# EAGLE board relay_wired (EAGLE 7.3.0)
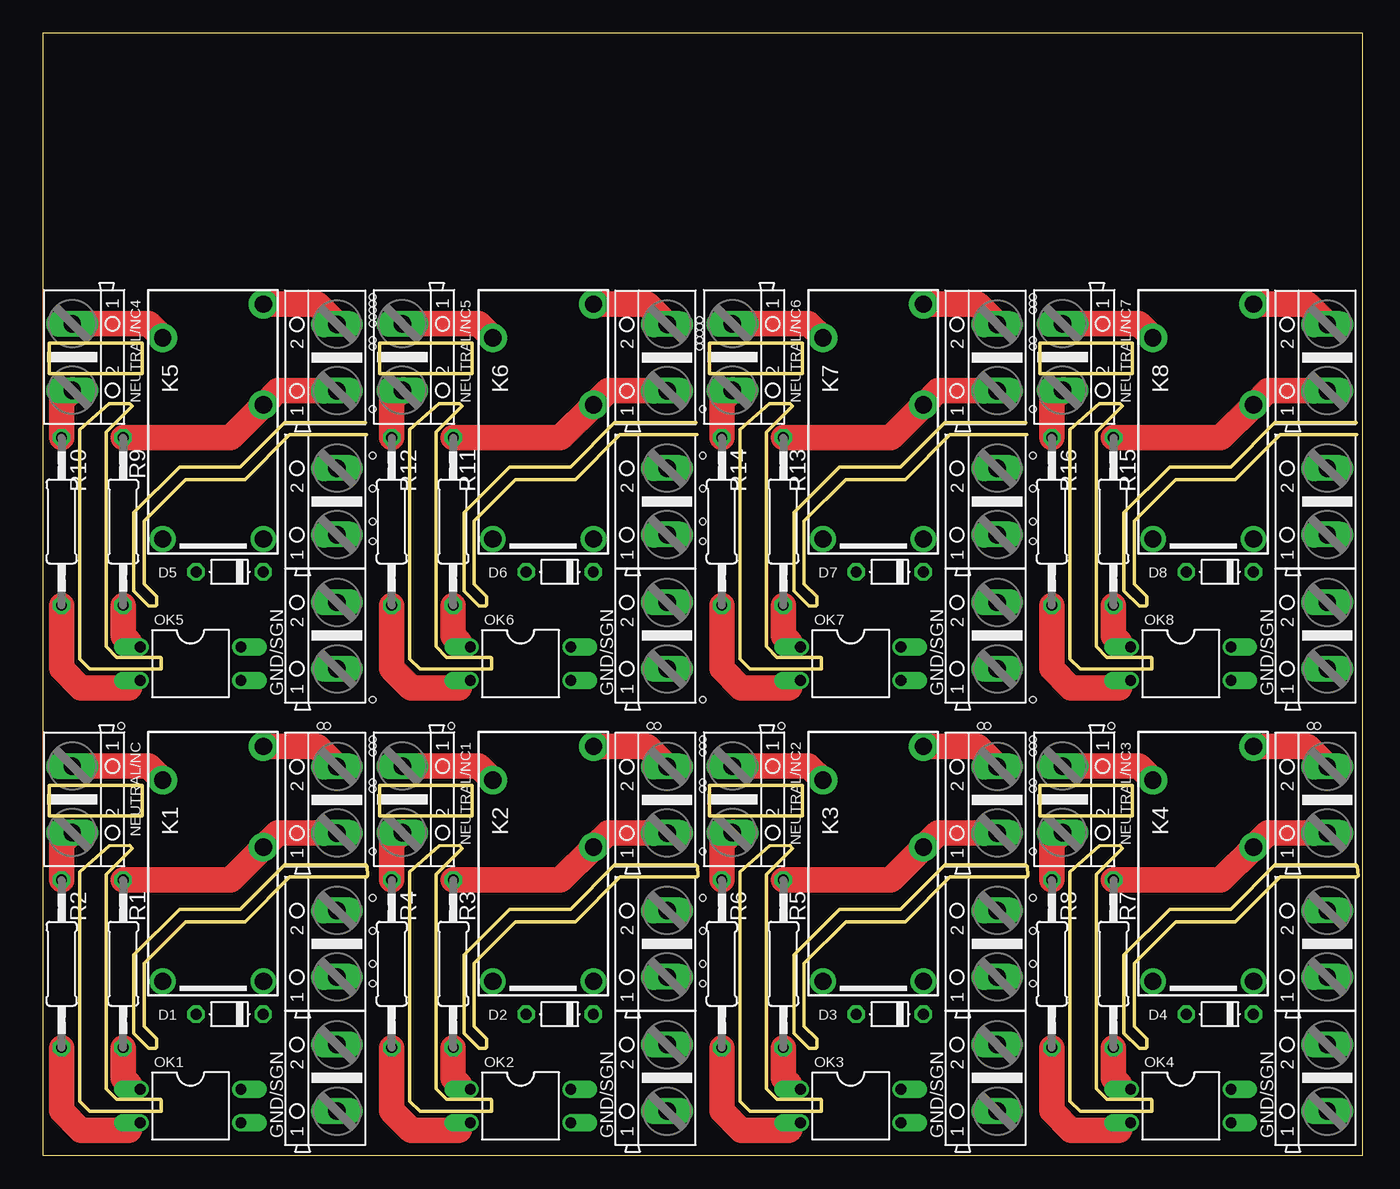
[diagram p0: board, top side]
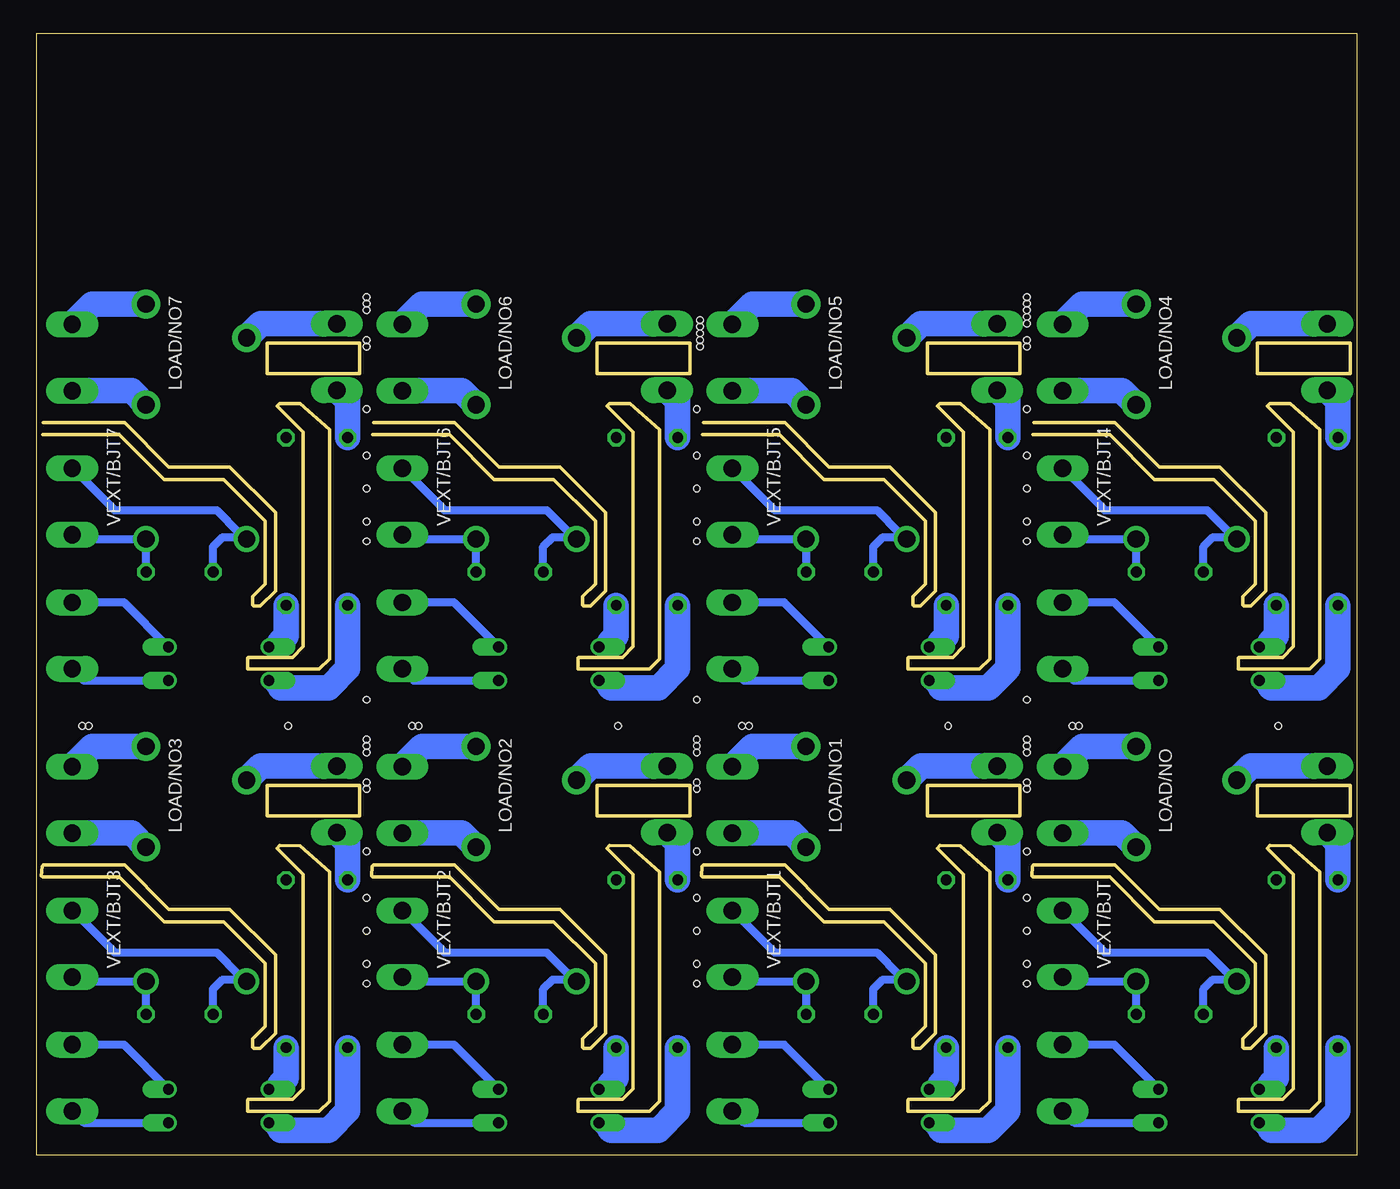
[diagram p1: board, bottom side, seen from below]

Size 100 x 85 mm. Coordinates in mm from the lower left corner, seen from the top.
Outline: 24.49,21.99 24.48,21.99
Outline: 24.48,21.99 18.33,21.99 14.98,18.64 10.37,18.64 6.91,15.18 6.91,9.24 8.05,8.1 8.56,8.1 8.64,8.18 8.64,8.81 7.68,9.77 7.68,14.54 10.83,17.69 15.35,17.69 18.73,21.07 24.55,21.07 24.63,21.15 24.59,21.88 24.48,21.99
Outline: 49.49,21.99 49.48,21.99
Outline: 49.48,21.99 43.33,21.99 39.98,18.64 35.37,18.64 31.91,15.18 31.91,9.24 33.05,8.1 33.56,8.1 33.64,8.18 33.64,8.81 32.68,9.77 32.68,14.54 35.83,17.69 40.35,17.69 43.73,21.07 49.55,21.07 49.63,21.15 49.59,21.88 49.48,21.99
Outline: 74.49,21.99 74.48,21.99
Outline: 74.48,21.99 68.33,21.99 64.98,18.64 60.37,18.64 56.91,15.18 56.91,9.24 58.05,8.1 58.56,8.1 58.64,8.18 58.64,8.81 57.68,9.77 57.68,14.54 60.83,17.69 65.35,17.69 68.73,21.07 74.55,21.07 74.63,21.15 74.59,21.88 74.48,21.99
Outline: 99.49,21.99 99.48,21.99
Outline: 99.48,21.99 93.33,21.99 89.98,18.64 85.37,18.64 81.91,15.18 81.91,9.24 83.05,8.1 83.56,8.1 83.64,8.18 83.64,8.81 82.68,9.77 82.68,14.54 85.83,17.69 90.35,17.69 93.73,21.07 99.55,21.07 99.63,21.15 99.59,21.88 99.48,21.99
Outline: 24.48,55.49 18.33,55.49 14.98,52.14 10.37,52.14 6.91,48.68 6.91,42.74 8.05,41.6 8.56,41.6 8.64,41.68 8.64,42.31 7.68,43.27 7.68,48.04 10.83,51.19 15.35,51.19 18.73,54.57 24.55,54.57
Outline: 49.48,55.49 43.33,55.49 39.98,52.14 35.37,52.14 31.91,48.68 31.91,42.74 33.05,41.6 33.56,41.6 33.64,41.68 33.64,42.31 32.68,43.27 32.68,48.04 35.83,51.19 40.35,51.19 43.73,54.57 49.55,54.57
Outline: 74.48,55.49 68.33,55.49 64.98,52.14 60.37,52.14 56.91,48.68 56.91,42.74 58.05,41.6 58.56,41.6 58.64,41.68 58.64,42.31 57.68,43.27 57.68,48.04 60.83,51.19 65.35,51.19 68.73,54.57 74.55,54.57
Outline: 99.48,55.49 93.33,55.49 89.98,52.14 85.37,52.14 81.91,48.68 81.91,42.74 83.05,41.6 83.56,41.6 83.64,41.68 83.64,42.31 82.68,43.27 82.68,48.04 85.83,51.19 90.35,51.19 93.73,54.57 99.55,54.57
Outline: 0,0 100,0 100,85 0,85 0,0
Outline: 0.52,28 0.52,25.72 7.54,25.72 7.54,28 0.52,28
Outline: 5.04,23.43 2.81,21.45 2.81,4.1 3.59,3.32 9,3.32 9,4.18 8.96,4.22 5.61,4.22 4.81,5.02 4.81,21.28 6.78,23.25 6.59,23.45 5.04,23.43
Outline: 25.52,28 25.52,25.72 32.54,25.72 32.54,28 25.52,28
Outline: 30.04,23.43 27.81,21.45 27.81,4.1 28.59,3.32 34,3.32 34,4.18 33.96,4.22 30.61,4.22 29.81,5.02 29.81,21.28 31.78,23.25 31.59,23.45 30.04,23.43
Outline: 50.52,28 50.52,25.72 57.54,25.72 57.54,28 50.52,28
Outline: 55.04,23.43 52.81,21.45 52.81,4.1 53.59,3.32 59,3.32 59,4.18 58.96,4.22 55.61,4.22 54.81,5.02 54.81,21.28 56.78,23.25 56.59,23.45 55.04,23.43
Outline: 75.52,28 75.52,25.72 82.54,25.72 82.54,28 75.52,28
Outline: 80.04,23.43 77.81,21.45 77.81,4.1 78.59,3.32 84,3.32 84,4.18 83.96,4.22 80.61,4.22 79.81,5.02 79.81,21.28 81.78,23.25 81.59,23.45 80.04,23.43
Outline: 0.52,61.5 0.52,59.22 7.54,59.22 7.54,61.5 0.52,61.5
Outline: 5.04,56.93 2.81,54.95 2.81,37.6 3.59,36.82 9,36.82 9,37.68 8.96,37.72 5.61,37.72 4.81,38.52 4.81,54.78 6.78,56.75 6.59,56.95 5.04,56.93
Outline: 25.52,61.5 25.52,59.22 32.54,59.22 32.54,61.5 25.52,61.5
Outline: 30.04,56.93 27.81,54.95 27.81,37.6 28.59,36.82 34,36.82 34,37.68 33.96,37.72 30.61,37.72 29.81,38.52 29.81,54.78 31.78,56.75 31.59,56.95 30.04,56.93
Outline: 50.52,61.5 50.52,59.22 57.54,59.22 57.54,61.5 50.52,61.5
Outline: 55.04,56.93 52.81,54.95 52.81,37.6 53.59,36.82 59,36.82 59,37.68 58.96,37.72 55.61,37.72 54.81,38.52 54.81,54.78 56.78,56.75 56.59,56.95 55.04,56.93
Outline: 75.52,61.5 75.52,59.22 82.54,59.22 82.54,61.5 75.52,61.5
Outline: 80.04,56.93 77.81,54.95 77.81,37.6 78.59,36.82 84,36.82 84,37.68 83.96,37.72 80.61,37.72 79.81,38.52 79.81,54.78 81.78,56.75 81.59,56.95 80.04,56.93
Copper layers (1*16): Top 0.035mm / dielectric 1.5mm / Bottom 0.035mm
Design rules "default": minimum track width 10mil, minimum drill 24mil, track to track 8mil, track to pad 8mil, pad to pad 8mil, via to via 8mil, smd to smd 8mil, copper to edge 40mil, drill to drill 8mil, minimum pad ring 10mil, minimum via ring 8mil, stop-mask expansion 4mil, vias tented up to drill 0mil, thermal gap 10mil
Holes 0.5 mm at 25,28.25 25,27.75 21.06,32.5 21.56,32.5 5.96,32.5 25,13 25,17 25,23 50,28.25 50,27.75 46.06,32.5 46.56,32.5 30.96,32.5 25,31.5 25,31 25,30.5 50,13 50,17 50,23 25,19.5 25,14.5 75,28.25 75,27.75 71.06,32.5 71.56,32.5 55.96,32.5 50,31.5 50,31 50,30.5 75,13 75,17 75,23 50,19.5 50,14.5 96.06,32.5 96.56,32.5 80.96,32.5 75,31.5 75,31 75,30.5 75,19.5 75,14.5 25,61.75 25,61.25 25,34.5 25,46.5 25,50.5 25,56.5 25,65 25,64.5 25,64 25,53 25,48 50,34.5 50,46.5 50,50.5 50,56.5 50,53 50,48 75,61.75 75,61.25 75,34.5 75,46.5 75,50.5 75,56.5 75,65 75,64.5 75,64 75,53 75,48 25,63.5 25,63 49.75,63.25 49.75,62.75 49.75,62.25 49.75,61.75 49.75,61.25

## Footprints (pad centres in the part's own frame; a part is rotated, then mirrored left to right if it is on the bottom)
D-5 = drill 0.813 octagon: A 2.54,0; C -2.54,0
AK500/2 = drill 1.321 long: 1 -2.515,0; 2 2.515,0
G5SB = drill 1.3 pad 1.93: 1 7.62,3.81; 5 7.62,-3.81 | drill 1.3 pad 2.184: 2 -2.54,3.81; 3 -10.16,3.81; 4 -7.62,-3.81
DIL04 = drill 0.813 offset: 1 -1.27,-3.81; 2 1.27,-3.81; 3 1.27,3.81; 4 -1.27,3.81
0207/12 = drill 0.813 octagon: 1 -6.35,0; 2 6.35,0

## Placement (x,y rotation side)
D1  1N4007  [D-5]  14.17,10.68 180 top
D2  1N4007  [D-5]  39.17,10.68 180 top
D3  1N4007  [D-5]  64.17,10.68 180 top
D4  1N4007  [D-5]  89.17,10.68 180 top
D5  1N4007  [D-5]  14.17,44.18 180 top
D6  1N4007  [D-5]  39.17,44.18 180 top
D7  1N4007  [D-5]  64.17,44.18 180 top
D8  1N4007  [D-5]  89.17,44.18 180 top
GND/S  [AK500/2]  22.3,5.85 90 top
GND/S1  [AK500/2]  47.3,5.85 90 top
GND/S2  [AK500/2]  72.3,5.85 90 top
GND/S3  [AK500/2]  97.3,5.85 90 top
GND/S4  [AK500/2]  22.3,39.35 90 top
GND/S5  [AK500/2]  47.3,39.35 90 top
GND/S6  [AK500/2]  72.3,39.35 90 top
GND/S7  [AK500/2]  97.3,39.35 90 top
K1  G5Q-1-EU DC12  [G5SB]  12.91,20.79 270 top
K2  G5Q-1-EU DC12  [G5SB]  37.91,20.79 270 top
K3  G5Q-1-EU DC12  [G5SB]  62.91,20.79 270 top
K4  G5Q-1-EU DC12  [G5SB]  87.91,20.79 270 top
K5  G5Q-1-EU DC12  [G5SB]  12.91,54.29 270 top
K6  G5Q-1-EU DC12  [G5SB]  37.91,54.29 270 top
K7  G5Q-1-EU DC12  [G5SB]  62.91,54.29 270 top
K8  G5Q-1-EU DC12  [G5SB]  87.91,54.29 270 top
LOAD/NO  [AK500/2]  22.3,26.93 90 top
LOAD/NO1  [AK500/2]  47.3,26.93 90 top
LOAD/NO2  [AK500/2]  72.3,26.93 90 top
LOAD/NO3  [AK500/2]  97.3,26.93 90 top
LOAD/NO4  [AK500/2]  22.3,60.43 90 top
LOAD/NO5  [AK500/2]  47.3,60.43 90 top
LOAD/NO6  [AK500/2]  72.3,60.43 90 top
LOAD/NO7  [AK500/2]  97.3,60.43 90 top
NEUTRAL/NC  [AK500/2]  2.25,26.96 270 top
NEUTRAL/NC1  [AK500/2]  27.25,26.96 270 top
NEUTRAL/NC2  [AK500/2]  52.25,26.96 270 top
NEUTRAL/NC3  [AK500/2]  77.25,26.96 270 top
NEUTRAL/NC4  [AK500/2]  2.25,60.46 270 top
NEUTRAL/NC5  [AK500/2]  27.25,60.46 270 top
NEUTRAL/NC6  [AK500/2]  52.25,60.46 270 top
NEUTRAL/NC7  [AK500/2]  77.25,60.46 270 top
OK1  SFH620A  [DIL04]  11.21,3.73 270 top
OK2  SFH620A  [DIL04]  36.21,3.73 270 top
OK3  SFH620A  [DIL04]  61.21,3.73 270 top
OK4  SFH620A  [DIL04]  86.21,3.73 270 top
OK5  SFH620A  [DIL04]  11.21,37.23 270 top
OK6  SFH620A  [DIL04]  36.21,37.23 270 top
OK7  SFH620A  [DIL04]  61.21,37.23 270 top
OK8  SFH620A  [DIL04]  86.21,37.23 270 top
R1  22k/2W  [0207/12]  6.11,14.5 270 top
R2  22k/2W  [0207/12]  1.44,14.5 270 top
R3  22k/2W  [0207/12]  31.11,14.5 270 top
R4  22k/2W  [0207/12]  26.44,14.5 270 top
R5  22k/2W  [0207/12]  56.1,14.5 270 top
R6  22k/2W  [0207/12]  51.44,14.5 270 top
R7  22k/2W  [0207/12]  81.11,14.5 270 top
R8  22k/2W  [0207/12]  76.44,14.5 270 top
R9  22k/2W  [0207/12]  6.11,48 270 top
R10  22k/2W  [0207/12]  1.44,48 270 top
R11  22k/2W  [0207/12]  31.11,48 270 top
R12  22k/2W  [0207/12]  26.44,48 270 top
R13  22k/2W  [0207/12]  56.1,48 270 top
R14  22k/2W  [0207/12]  51.44,48 270 top
R15  22k/2W  [0207/12]  81.11,48 270 top
R16  22k/2W  [0207/12]  76.44,48 270 top
VEXT/BJT  [AK500/2]  22.3,16.02 90 top
VEXT/BJT1  [AK500/2]  47.3,16.02 90 top
VEXT/BJT2  [AK500/2]  72.3,16.02 90 top
VEXT/BJT3  [AK500/2]  97.3,16.02 90 top
VEXT/BJT4  [AK500/2]  22.3,49.52 90 top
VEXT/BJT5  [AK500/2]  47.3,49.52 90 top
VEXT/BJT6  [AK500/2]  72.3,49.52 90 top
VEXT/BJT7  [AK500/2]  97.3,49.52 90 top

## Library data of the parts
D1-D8 = diode
GND/S GND/S1-GND/S7 LOAD/NO LOAD/NO1-LOAD/NO7 NEUTRAL/NC NEUTRAL/NC1-NEUTRAL/NC7 VEXT/BJT VEXT/BJT1-VEXT/BJT7 = con-ptr500-modified; OC_FARNELL: unknown; OC_NEWARK: unknown
K1-K8 = relay; OC_FARNELL: unknown; OC_NEWARK: unknown
OK1-OK8 = optocoupler; MPN: SFH620A-2; OC_FARNELL: 1469594; OC_NEWARK: 97K9546
R1-R16 = rcl

## Nets
N$1: K5.2 LOAD/NO4.1 R9.1
N$2: NEUTRAL/NC4.2 R10.1
N$3: K5.4 NEUTRAL/NC4.1
N$4: OK5.2 R10.2
N$5: K1.2 LOAD/NO.1 R1.1
N$6: NEUTRAL/NC.2 R2.1
N$7: K1.4 NEUTRAL/NC.1
N$8: OK1.2 R2.2
N$9: OK5.1 R9.2
N$10: D5.C K5.1 VEXT/BJT4.1
N$11: D5.A K5.5 VEXT/BJT4.2
N$12: OK1.1 R1.2
N$13: K5.3 LOAD/NO4.2
N$14: GND/S4.2 OK5.4
N$15: GND/S4.1 OK5.3
N$16: K6.2 LOAD/NO5.1 R11.1
N$17: NEUTRAL/NC5.2 R12.1
N$18: K6.4 NEUTRAL/NC5.1
N$19: OK6.2 R12.2
N$20: OK6.1 R11.2
N$21: D6.C K6.1 VEXT/BJT5.1
N$22: D6.A K6.5 VEXT/BJT5.2
N$23: K6.3 LOAD/NO5.2
N$24: GND/S5.2 OK6.4
N$25: D1.C K1.1 VEXT/BJT.1
N$26: GND/S5.1 OK6.3
N$27: K7.2 LOAD/NO6.1 R13.1
N$28: NEUTRAL/NC6.2 R14.1
N$29: K7.4 NEUTRAL/NC6.1
N$30: D1.A K1.5 VEXT/BJT.2
N$31: K1.3 LOAD/NO.2
N$32: GND/S.2 OK1.4
N$33: GND/S.1 OK1.3
N$34: K2.2 LOAD/NO1.1 R3.1
N$35: NEUTRAL/NC1.2 R4.1
N$36: K2.4 NEUTRAL/NC1.1
N$37: OK2.2 R4.2
N$38: OK2.1 R3.2
N$39: D2.C K2.1 VEXT/BJT1.1
N$40: D2.A K2.5 VEXT/BJT1.2
N$41: K2.3 LOAD/NO1.2
N$42: GND/S1.2 OK2.4
N$43: GND/S1.1 OK2.3
N$44: K3.2 LOAD/NO2.1 R5.1
N$45: NEUTRAL/NC2.2 R6.1
N$46: K3.4 NEUTRAL/NC2.1
N$47: OK3.2 R6.2
N$48: OK3.1 R5.2
N$49: D3.C K3.1 VEXT/BJT2.1
N$50: D3.A K3.5 VEXT/BJT2.2
N$51: K3.3 LOAD/NO2.2
N$52: GND/S2.2 OK3.4
N$53: GND/S2.1 OK3.3
N$54: K4.2 LOAD/NO3.1 R7.1
N$55: NEUTRAL/NC3.2 R8.1
N$56: K4.4 NEUTRAL/NC3.1
N$57: OK4.2 R8.2
N$58: OK4.1 R7.2
N$59: D4.C K4.1 VEXT/BJT3.1
N$60: D4.A K4.5 VEXT/BJT3.2
N$61: K4.3 LOAD/NO3.2
N$62: GND/S3.2 OK4.4
N$63: GND/S3.1 OK4.3
N$64: OK7.2 R14.2
N$65: OK7.1 R13.2
N$66: D7.C K7.1 VEXT/BJT6.1
N$67: D7.A K7.5 VEXT/BJT6.2
N$68: K7.3 LOAD/NO6.2
N$69: GND/S6.2 OK7.4
N$70: GND/S6.1 OK7.3
N$71: K8.2 LOAD/NO7.1 R15.1
N$72: NEUTRAL/NC7.2 R16.1
N$73: K8.4 NEUTRAL/NC7.1
N$74: OK8.2 R16.2
N$75: OK8.1 R15.2
N$76: D8.C K8.1 VEXT/BJT7.1
N$77: D8.A K8.5 VEXT/BJT7.2
N$78: K8.3 LOAD/NO7.2
N$79: GND/S7.2 OK8.4
N$80: GND/S7.1 OK8.3

## Tracks (layer width: path | path; a pad name or v marks a point on that pad's centre or on a via)
N$1
  Top 1.93: LOAD/NO4.1 17.81,57.91 16.85,56.95 | R9.1 14.24,54.35 K5.2
  Bottom 1.93: LOAD/NO4.1 17.8,57.91 K5.2
N$2
  Top 1.93: R10.1 1.44,57.14 2.3,58
  Bottom 1.93: R10.1 1.44,57.14 NEUTRAL/NC4.2
N$3
  Top 1.93: NEUTRAL/NC4.1 8.02,62.98 9.05,61.95
  Bottom 1.93: NEUTRAL/NC4.1 8.04,62.98 K5.4
N$4
  Top 1.016: 6.6,35.45 6.8,35.45 7.3,35.95
  Top 1.93: R10.2 1.44,36.86 2.9,35.4 6.55,35.4 6.6,35.45
  Bottom 1.27: 6.6,35.5 6.94,35.5 OK5.2
  Bottom 1.93: R10.2 1.44,36.86 2.9,35.4 6.5,35.4 6.6,35.5
N$5
  Top 1.93: LOAD/NO.1 17.81,24.41 16.85,23.45 | R1.1 14.24,20.85 K1.2
  Bottom 1.93: LOAD/NO.1 17.8,24.41 K1.2
N$6
  Top 1.93: R2.1 1.44,23.64 2.3,24.5
  Bottom 1.93: R2.1 1.44,23.64 NEUTRAL/NC.2
N$7
  Top 1.93: NEUTRAL/NC.1 8.02,29.48 9.05,28.45
  Bottom 1.93: NEUTRAL/NC.1 8.04,29.48 K1.4
N$8
  Top 1.016: 6.6,1.95 6.8,1.95 7.3,2.45
  Top 1.93: R2.2 1.44,3.36 2.9,1.9 6.55,1.9 6.6,1.95
  Bottom 1.27: 6.6,2 6.94,2 OK1.2
  Bottom 1.93: R2.2 1.44,3.36 2.9,1.9 6.5,1.9 6.6,2
N$9
  Top 0.61: 6.6,38.85 7.05,38.85 OK5.1
  Top 1.93: R9.2 6.11,39.34 6.6,38.85
  Bottom 0.61: 6.6,38.85 7.05,38.85 OK5.1
  Bottom 1.93: R9.2 6.11,39.34 6.6,38.85
N$10
  Bottom 0.61: VEXT/BJT4.1 21.97,46.67 K5.1 16.71,46.66 D5.C
N$11
  Bottom 0.61: VEXT/BJT4.2 22.28,52.03 19.1,48.85 11.36,48.85 9.68,47.17 9.68,46.82 | D5.A 11.63,46.09 10.9,46.82 9.68,46.82 | 9.68,46.82 9.25,46.82 K5.5
N$12
  Top 0.61: 6.6,5.35 7.05,5.35 OK1.1
  Top 1.93: R1.2 6.11,5.84 6.6,5.35
  Bottom 0.61: 6.6,5.35 7.05,5.35 OK1.1
  Bottom 1.93: R1.2 6.11,5.84 6.6,5.35
N$13
  Top 1.93: K5.3 20.8,64.45 LOAD/NO4.2
  Bottom 1.93: K5.3 20.79,64.45 LOAD/NO4.2
N$14
  Bottom 0.61: OK5.4 18.38,41.87 GND/S4.2
N$15
  Bottom 0.61: GND/S4.1 21.42,35.96 OK5.3
N$16
  Top 1.93: LOAD/NO5.1 42.81,57.91 41.85,56.95 | R11.1 39.24,54.35 K6.2
  Bottom 1.93: LOAD/NO5.1 42.8,57.91 K6.2
N$17
  Top 1.93: R12.1 26.44,57.14 27.3,58
  Bottom 1.93: R12.1 26.44,57.14 NEUTRAL/NC5.2
N$18
  Top 1.93: NEUTRAL/NC5.1 33.02,62.98 34.05,61.95
  Bottom 1.93: NEUTRAL/NC5.1 33.04,62.98 K6.4
N$19
  Top 1.016: 31.6,35.45 31.8,35.45 32.3,35.95
  Top 1.93: R12.2 26.44,36.86 27.9,35.4 31.55,35.4 31.6,35.45
  Bottom 1.27: 31.6,35.5 31.94,35.5 OK6.2
  Bottom 1.93: R12.2 26.44,36.86 27.9,35.4 31.5,35.4 31.6,35.5
N$20
  Top 0.61: 31.6,38.85 32.05,38.85 OK6.1
  Top 1.93: R11.2 31.11,39.34 31.6,38.85
  Bottom 0.61: 31.6,38.85 32.05,38.85 OK6.1
  Bottom 1.93: R11.2 31.11,39.34 31.6,38.85
N$21
  Bottom 0.61: VEXT/BJT5.1 46.97,46.67 K6.1 41.71,46.66 D6.C
N$22
  Bottom 0.61: VEXT/BJT5.2 47.28,52.03 44.1,48.85 36.36,48.85 34.68,47.17 34.68,46.82 | D6.A 36.63,46.09 35.9,46.82 34.68,46.82 | 34.68,46.82 34.25,46.82 K6.5
N$23
  Top 1.93: K6.3 45.8,64.45 LOAD/NO5.2
  Bottom 1.93: K6.3 45.79,64.45 LOAD/NO5.2
N$24
  Bottom 0.61: OK6.4 43.38,41.87 GND/S5.2
N$25
  Bottom 0.61: VEXT/BJT.1 21.97,13.17 K1.1 16.71,13.16 D1.C
N$26
  Bottom 0.61: GND/S5.1 46.42,35.96 OK6.3
N$27
  Top 1.93: LOAD/NO6.1 67.81,57.91 66.85,56.95 | R13.1 64.24,54.35 K7.2
  Bottom 1.93: LOAD/NO6.1 67.8,57.91 K7.2
N$28
  Top 1.93: R14.1 51.44,57.14 52.3,58
  Bottom 1.93: R14.1 51.44,57.14 NEUTRAL/NC6.2
N$29
  Top 1.93: NEUTRAL/NC6.1 58.02,62.98 59.05,61.95
  Bottom 1.93: NEUTRAL/NC6.1 58.04,62.98 K7.4
N$30
  Bottom 0.61: VEXT/BJT.2 22.28,18.53 19.1,15.35 11.36,15.35 9.68,13.67 9.68,13.32 | D1.A 11.63,12.59 10.9,13.32 9.68,13.32 | 9.68,13.32 9.25,13.32 K1.5
N$31
  Top 1.93: K1.3 20.8,30.95 LOAD/NO.2
  Bottom 1.93: K1.3 20.79,30.95 LOAD/NO.2
N$32
  Bottom 0.61: OK1.4 18.38,8.37 GND/S.2
N$33
  Bottom 0.61: GND/S.1 21.42,2.46 OK1.3
N$34
  Top 1.93: LOAD/NO1.1 42.81,24.41 41.85,23.45 | R3.1 39.24,20.85 K2.2
  Bottom 1.93: LOAD/NO1.1 42.8,24.41 K2.2
N$35
  Top 1.93: R4.1 26.44,23.64 27.3,24.5
  Bottom 1.93: R4.1 26.44,23.64 NEUTRAL/NC1.2
N$36
  Top 1.93: NEUTRAL/NC1.1 33.02,29.48 34.05,28.45
  Bottom 1.93: NEUTRAL/NC1.1 33.04,29.48 K2.4
N$37
  Top 1.016: 31.6,1.95 31.8,1.95 32.3,2.45
  Top 1.93: R4.2 26.44,3.36 27.9,1.9 31.55,1.9 31.6,1.95
  Bottom 1.27: 31.6,2 31.94,2 OK2.2
  Bottom 1.93: R4.2 26.44,3.36 27.9,1.9 31.5,1.9 31.6,2
N$38
  Top 0.61: 31.6,5.35 32.05,5.35 OK2.1
  Top 1.93: R3.2 31.11,5.84 31.6,5.35
  Bottom 0.61: 31.6,5.35 32.05,5.35 OK2.1
  Bottom 1.93: R3.2 31.11,5.84 31.6,5.35
N$39
  Bottom 0.61: VEXT/BJT1.1 46.97,13.17 K2.1 41.71,13.16 D2.C
N$40
  Bottom 0.61: VEXT/BJT1.2 47.28,18.53 44.1,15.35 36.36,15.35 34.68,13.67 34.68,13.32 | D2.A 36.63,12.59 35.9,13.32 34.68,13.32 | 34.68,13.32 34.25,13.32 K2.5
N$41
  Top 1.93: K2.3 45.8,30.95 LOAD/NO1.2
  Bottom 1.93: K2.3 45.79,30.95 LOAD/NO1.2
N$42
  Bottom 0.61: OK2.4 43.38,8.37 GND/S1.2
N$43
  Bottom 0.61: GND/S1.1 46.42,2.46 OK2.3
N$44
  Top 1.93: LOAD/NO2.1 67.81,24.41 66.85,23.45 | R5.1 64.24,20.85 K3.2
  Bottom 1.93: LOAD/NO2.1 67.8,24.41 K3.2
N$45
  Top 1.93: R6.1 51.44,23.64 52.3,24.5
  Bottom 1.93: R6.1 51.44,23.64 NEUTRAL/NC2.2
N$46
  Top 1.93: NEUTRAL/NC2.1 58.02,29.48 59.05,28.45
  Bottom 1.93: NEUTRAL/NC2.1 58.04,29.48 K3.4
N$47
  Top 1.016: 56.6,1.95 56.8,1.95 57.3,2.45
  Top 1.93: R6.2 51.44,3.36 52.9,1.9 56.55,1.9 56.6,1.95
  Bottom 1.27: 56.6,2 56.94,2 OK3.2
  Bottom 1.93: R6.2 51.44,3.36 52.9,1.9 56.5,1.9 56.6,2
N$48
  Top 0.61: 56.6,5.35 57.05,5.35 OK3.1
  Top 1.93: R5.2 56.1,5.84 56.6,5.35
  Bottom 0.61: 56.6,5.35 57.05,5.35 OK3.1
  Bottom 1.93: R5.2 56.1,5.84 56.6,5.35
N$49
  Bottom 0.61: VEXT/BJT2.1 71.97,13.17 K3.1 66.71,13.16 D3.C
N$50
  Bottom 0.61: VEXT/BJT2.2 72.28,18.53 69.1,15.35 61.36,15.35 59.68,13.67 59.68,13.32 | D3.A 61.63,12.59 60.9,13.32 59.68,13.32 | 59.68,13.32 59.25,13.32 K3.5
N$51
  Top 1.93: K3.3 70.8,30.95 LOAD/NO2.2
  Bottom 1.93: K3.3 70.79,30.95 LOAD/NO2.2
N$52
  Bottom 0.61: OK3.4 68.38,8.37 GND/S2.2
N$53
  Bottom 0.61: GND/S2.1 71.42,2.46 OK3.3
N$54
  Top 1.93: LOAD/NO3.1 92.81,24.41 91.85,23.45 | R7.1 89.24,20.85 K4.2
  Bottom 1.93: LOAD/NO3.1 92.8,24.41 K4.2
N$55
  Top 1.93: R8.1 76.44,23.64 77.3,24.5
  Bottom 1.93: R8.1 76.44,23.64 NEUTRAL/NC3.2
N$56
  Top 1.93: NEUTRAL/NC3.1 83.02,29.48 84.05,28.45
  Bottom 1.93: NEUTRAL/NC3.1 83.04,29.48 K4.4
N$57
  Top 1.016: 81.6,1.95 81.8,1.95 82.3,2.45
  Top 1.93: R8.2 76.44,3.36 77.9,1.9 81.55,1.9 81.6,1.95
  Bottom 1.27: 81.6,2 81.94,2 OK4.2
  Bottom 1.93: R8.2 76.44,3.36 77.9,1.9 81.5,1.9 81.6,2
N$58
  Top 0.61: 81.6,5.35 82.05,5.35 OK4.1
  Top 1.93: R7.2 81.11,5.84 81.6,5.35
  Bottom 0.61: 81.6,5.35 82.05,5.35 OK4.1
  Bottom 1.93: R7.2 81.11,5.84 81.6,5.35
N$59
  Bottom 0.61: VEXT/BJT3.1 96.97,13.17 K4.1 91.71,13.16 D4.C
N$60
  Bottom 0.61: VEXT/BJT3.2 97.28,18.53 94.1,15.35 86.36,15.35 84.68,13.67 84.68,13.32 | D4.A 86.63,12.59 85.9,13.32 84.68,13.32 | 84.68,13.32 84.25,13.32 K4.5
N$61
  Top 1.93: K4.3 95.8,30.95 LOAD/NO3.2
  Bottom 1.93: K4.3 95.79,30.95 LOAD/NO3.2
N$62
  Bottom 0.61: OK4.4 93.38,8.37 GND/S3.2
N$63
  Bottom 0.61: GND/S3.1 96.42,2.46 OK4.3
N$64
  Top 1.016: 56.6,35.45 56.8,35.45 57.3,35.95
  Top 1.93: R14.2 51.44,36.86 52.9,35.4 56.55,35.4 56.6,35.45
  Bottom 1.27: 56.6,35.5 56.94,35.5 OK7.2
  Bottom 1.93: R14.2 51.44,36.86 52.9,35.4 56.5,35.4 56.6,35.5
N$65
  Top 0.61: 56.6,38.85 57.05,38.85 OK7.1
  Top 1.93: R13.2 56.1,39.34 56.6,38.85
  Bottom 0.61: 56.6,38.85 57.05,38.85 OK7.1
  Bottom 1.93: R13.2 56.1,39.34 56.6,38.85
N$66
  Bottom 0.61: VEXT/BJT6.1 71.97,46.67 K7.1 66.71,46.66 D7.C
N$67
  Bottom 0.61: VEXT/BJT6.2 72.28,52.03 69.1,48.85 61.36,48.85 59.68,47.17 59.68,46.82 | D7.A 61.63,46.09 60.9,46.82 59.68,46.82 | 59.68,46.82 59.25,46.82 K7.5
N$68
  Top 1.93: K7.3 70.8,64.45 LOAD/NO6.2
  Bottom 1.93: K7.3 70.79,64.45 LOAD/NO6.2
N$69
  Bottom 0.61: OK7.4 68.38,41.87 GND/S6.2
N$70
  Bottom 0.61: GND/S6.1 71.42,35.96 OK7.3
N$71
  Top 1.93: LOAD/NO7.1 92.81,57.91 91.85,56.95 | R15.1 89.24,54.35 K8.2
  Bottom 1.93: LOAD/NO7.1 92.8,57.91 K8.2
N$72
  Top 1.93: R16.1 76.44,57.14 77.3,58
  Bottom 1.93: R16.1 76.44,57.14 NEUTRAL/NC7.2
N$73
  Top 1.93: NEUTRAL/NC7.1 83.02,62.98 84.05,61.95
  Bottom 1.93: NEUTRAL/NC7.1 83.04,62.98 K8.4
N$74
  Top 1.016: 81.6,35.45 81.8,35.45 82.3,35.95
  Top 1.93: R16.2 76.44,36.86 77.9,35.4 81.55,35.4 81.6,35.45
  Bottom 1.27: 81.6,35.5 81.94,35.5 OK8.2
  Bottom 1.93: R16.2 76.44,36.86 77.9,35.4 81.5,35.4 81.6,35.5
N$75
  Top 0.61: 81.6,38.85 82.05,38.85 OK8.1
  Top 1.93: R15.2 81.11,39.34 81.6,38.85
  Bottom 0.61: 81.6,38.85 82.05,38.85 OK8.1
  Bottom 1.93: R15.2 81.11,39.34 81.6,38.85
N$76
  Bottom 0.61: VEXT/BJT7.1 96.97,46.67 K8.1 91.71,46.66 D8.C
N$77
  Bottom 0.61: VEXT/BJT7.2 97.28,52.03 94.1,48.85 86.36,48.85 84.68,47.17 84.68,46.82 | D8.A 86.63,46.09 85.9,46.82 84.68,46.82 | 84.68,46.82 84.25,46.82 K8.5
N$78
  Top 1.93: K8.3 95.8,64.45 LOAD/NO7.2
  Bottom 1.93: K8.3 95.79,64.45 LOAD/NO7.2
N$79
  Bottom 0.61: OK8.4 93.38,41.87 GND/S7.2
N$80
  Bottom 0.61: GND/S7.1 96.42,35.96 OK8.3

## Text on the board
tNames: GND/SGN | GND/SGN | GND/SGN | GND/SGN | GND/SGN | GND/SGN | GND/SGN | GND/SGN